# EAGLE board MosfetV3 (EAGLE 9.3.0)
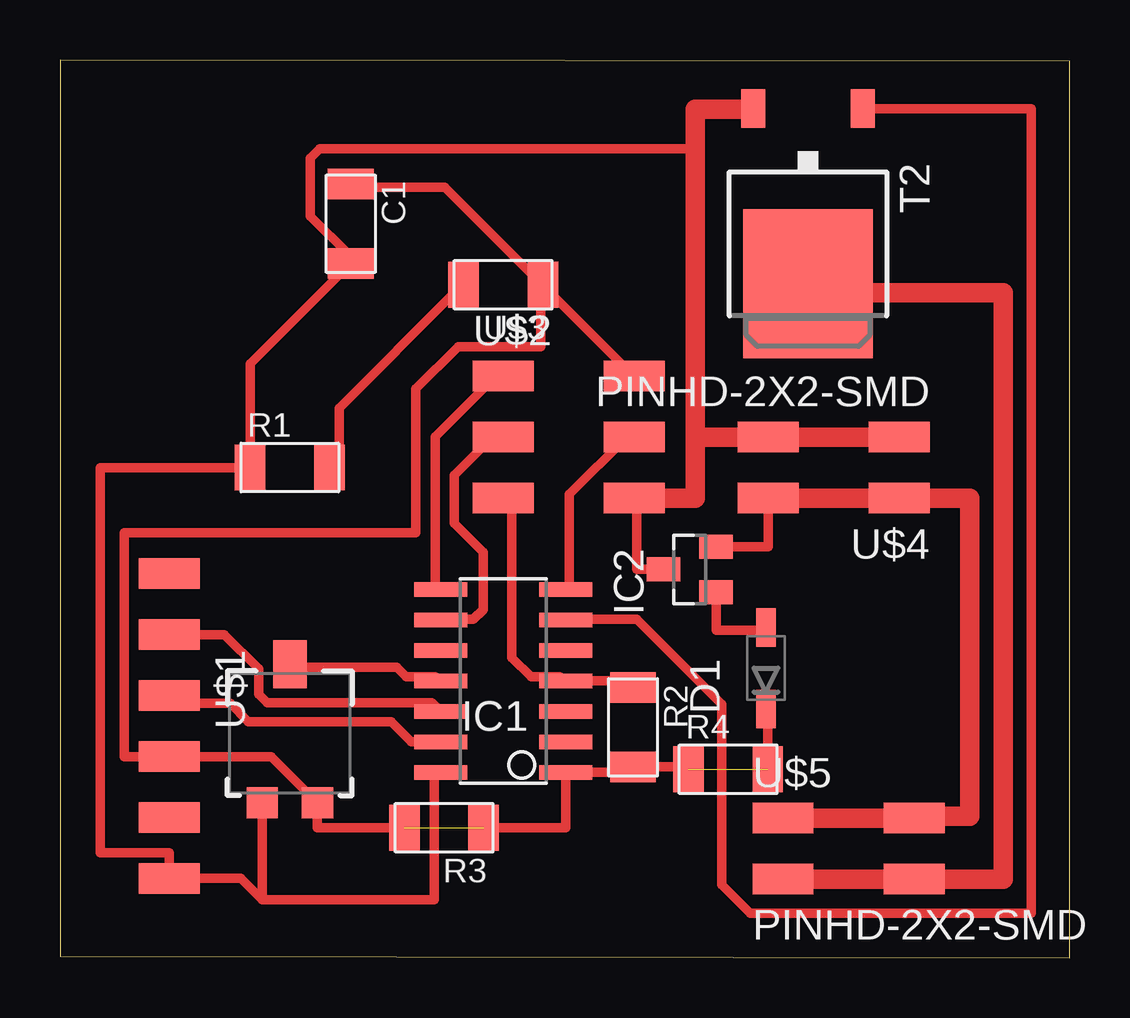
[diagram p0: board, top side]

Size 42.06 x 37.4 mm. Coordinates in mm from the lower left corner, seen from the top.
Outline: 0,0.05 42.06,0 42.06,37.35 0,37.4 0,0.05
Copper layers (1*16): Top 0.035mm / dielectric 1.5mm / Bottom 0.035mm
Design rules "default *": minimum track width 0.4mm, minimum drill 0.8mm, track to track 0.4mm, track to pad 0.4mm, pad to pad 0.4mm, via to via 0.4mm, smd to smd 0.4mm, copper to edge 40mil, drill to drill 6mil, minimum pad ring 10mil, minimum via ring 8mil, stop-mask expansion 4mil, vias tented up to drill 0mil, thermal gap 10mil

## Footprints (pad centres in the part's own frame; a part is rotated, then mirrored left to right if it is on the bottom)
C1206FAB = smd 1.27 x 1.905: 1 -1.651,0; 2 1.651,0
SOD123 = smd 1.6 x 0.8: ANODE 1.7,0; CATHODE -1.7,0
SOIC14 = smd 0.61 x 2.21: 1 -3.81,-2.603; 2 -2.54,-2.603; 3 -1.27,-2.603; 4 0,-2.603; 5 1.27,-2.603; 6 2.54,-2.603; 7 3.81,-2.603; 8 3.81,2.603; 9 2.54,2.603; 10 1.27,2.603; 11 0,2.603; 12 -1.27,2.603; 13 -2.54,2.603; 14 -3.81,2.603
SOT23 = smd 1 x 1.4: 1 -0.95,-1.1; 2 0.95,-1.1; 3 0,1.1
R1206FAB = smd 1.27 x 1.905: 1 -1.651,0; 2 1.651,0
TO252 = smd 1 x 1.6: 1 -2.28,-4.8; 2 2.28,-4.8 | smd 5.4 x 6.2: 3 0,2.5
1X06SMD = smd 2.54 x 1.27: 1 0,6.35; 2 0,3.81; 3 0,1.27; 4 0,-1.27; 5 0,-3.81; 6 0,-6.35
2X03SMD = smd 2.54 x 1.27: 1 -2.54,2.54; 2 2.92,2.54; 3 -2.54,0; 4 2.92,0; 5 -2.54,-2.54; 6 2.92,-2.54
LED1206FAB = smd 1.27 x 1.905: 1 -1.651,0; 2 1.651,0
2X02SMD = smd 2.54 x 1.27: 1 -2.54,1.27; 2 2.92,1.27; 3 -2.54,-1.27; 4 2.92,-1.27
TRIMPOT-SMD-5MM = smd 1.3 x 1.3: A 1.15,-2.54; C -1.15,-2.54 | smd 1.402 x 2: B 0,3.239

## Placement (x,y rotation side)
C1  1uF  [C1206FAB]  12.12,30.58 270 top
D1  [SOD123]  29.41,12.07 90 top
IC1  ATTINY44-SSU  [SOIC14]  18.47,11.53 90 top
IC2  [SOT23]  26.24,16.18 90 top
R1  499  [R1206FAB]  9.58,20.42 0 top
R2  10K  [R1206FAB]  23.88,9.6 270 top
R3  0  [R1206FAB]  16,5.41 180 top
R4  0  [R1206FAB]  27.84,7.85 0 top
T2  [TO252]  31.17,30.58 180 top
U$1  FTDI-SMD-HEADER  [1X06SMD]  4.55,9.65 180 top
U$2  AVRISPSMD  [2X03SMD]  21.01,21.69 0 top
U$3  LEDFAB1206  [LED1206FAB]  18.47,28.04 180 top
U$4  PINHD-2X2-SMD  [2X02SMD]  32.44,20.42 180 top
U$5  PINHD-2X2-SMD  [2X02SMD]  32.66,4.55 0 top
VR1  5k  [TRIMPOT-SMD-5MM]  9.58,8.99 0 top

## Library data of the parts
C1 D1 IC1 IC2 R1-R4 T2 U$1-U$5 = fab
VR1 = SparkFun-Resistors; PROD_ID: RES-11156

## Nets
0: C1.2 IC1.14 IC2.3 R1.1 T2.2 U$1.1 U$2.6 U$4.3 U$4.4 VR1.C
12V: IC2.2 U$4.1 U$4.2 U$5.1 U$5.2
ANALOG: IC1.11 VR1.B
MISO: IC1.8 U$2.1
MOSFET: T2.3 U$5.3 U$5.4
MOSI: IC1.7 U$2.4
MOTOR: IC1.6 T2.1
N$1: R1.2 U$3.2
N$5: IC1.5
N$6: IC1.3
N$7: IC1.2
N$11: D1.ANODE IC2.1
N$12: IC1.10
RST: IC1.4 R2.1 U$2.5
RX: IC1.12 U$1.5
SCK: IC1.9 U$2.3
TX: IC1.13 U$1.4
VCC: C1.1 D1.CATHODE IC1.1 R2.2 R3.1 R3.2 R4.1 R4.2 U$1.3 U$2.2 U$3.1 VR1.A

## Tracks (layer width: path | path; a pad name or v marks a point on that pad's centre or on a via)
0
  Top 0.4: 8.43,6.1 VR1.C 8.43,2.41 | 15.63,7.7 IC1.14 15.6,7.72 15.6,2.41 8.43,2.41 | 35.23,21.7 U$4.3 34.83,21.7 | 28.83,35.3 T2.2 | U$2.6 24.03,19.3 24.03,16.18 IC2.3 | 29.63,21.7 U$4.4 | 26.47,34.09 26.47,33.7 10.83,33.7 10.43,33.3 10.43,30.9 12.03,29.3 C1.2 7.92,24.74 R1.1 1.69,20.42 1.69,4.38 4.55,4.38 U$1.1 7.54,3.3 8.43,2.41
  Top 0.813: 26.47,21.69 U$4.4 U$4.3 | 26.47,21.69 26.47,34.09 26.47,35.36 28.89,35.36 T2.2 | U$2.6 26.47,19.15 26.47,21.69
12V
  Top 0.4: 29.63,19.3 U$4.2 | 34.83,19.3 U$4.1 | 35.57,5.85 U$5.2 | 30.37,5.85 U$5.1 | 29.23,18.9 U$4.2 | IC2.2 29.52,17.13 U$4.2
  Top 0.813: U$4.1 37.9,19.15 37.9,5.89 35.58,5.89 U$5.2 30.37,5.82 30.37,5.85 | U$4.2 34.83,19.15 34.83,19.3
ANALOG
  Top 0.4: VR1.B 9.63,12.1 14.03,12.1 14.43,11.7 15.63,11.7 IC1.11
MISO
  Top 0.4: IC1.8 15.63,15.3 15.63,21.7 18.43,24.5 U$2.1
MOSFET
  Top 0.4: 30.37,3.45 U$5.3 | 35.57,3.45 U$5.4 35.97,3.45 | 32.03,27.7 31.23,27.7 T2.3
  Top 0.813: 31.23,27.7 39.29,27.7 39.29,3.28 U$5.4 U$5.3
MOSI
  Top 0.4: IC1.7 21.23,15.3 21.23,19.3 23.63,21.7 U$2.4
MOTOR
  Top 0.4: 33.63,35.3 T2.1 40.46,35.38 40.46,1.85 28.77,1.85 27.57,3.05 27.57,10.56 24.03,14.1 21.23,14.1 IC1.6
N$1
  Top 0.4: R1.2 11.63,20.5 11.63,22.9 16.43,27.7 U$3.2
N$11
  Top 0.4: IC2.1 27.34,13.64 29.41,13.64 D1.ANODE
RST
  Top 0.4: 23.51,11.31 R2.1 23.88,11.53 IC1.4 20.83,11.7 19.63,11.7 18.83,12.5 18.83,18.9 U$2.5
RX
  Top 0.4: IC1.12 15.5,10.63 14.51,10.63 8.63,10.63 8.28,10.98 8.28,12.03 6.84,13.46 U$1.5
SCK
  Top 0.4: IC1.9 16.03,14.1 17.23,14.1 17.63,14.5 17.63,16.9 16.43,18.1 16.43,20.1 17.63,21.3 18.43,21.3 U$2.3
TX
  Top 0.4: IC1.13 14.63,8.99 13.79,9.83 7.85,9.83 7.09,10.59 4.88,10.59 U$1.4
VCC  (2 unrouted)
  Top 0.4: 20.03,28.1 16.03,32.1 12.43,32.1 C1.1 | 20.03,28.1 U$3.1 20.43,27.7 23.63,24.5 U$2.2 | 23.51,8.11 R2.2 | 21.23,7.7 IC1.1 | R3.2 10.73,5.41 VR1.A 8.79,8.38 U$1.3 2.68,8.38 2.68,17.7 14.83,17.7 14.83,23.7 16.6,25.47 20.03,25.47 20.03,28.1 | R3.1 21.07,5.41 IC1.1 | IC1.1 23.88,7.72 R2.2 | R2.2 26.19,7.95 R4.1 | D1.CATHODE 29.49,10.37 R4.2